# Altium PCB PROC091F_ASCII.PcbDoc (part 2 of 7)
Units mil, origin at the board's own origin, x right, y up, seen from the top; angles counter-clockwise.
Board outline 3590.95 x 906.17 mil, 8 copper layers (Top Layer, GND1, Sig1, PWR1, PWR2, Sig2, GND2, Bottom Layer), stack 63.146 mil thick; 420 components, 316 nets, 1432 pads, 774 vias.
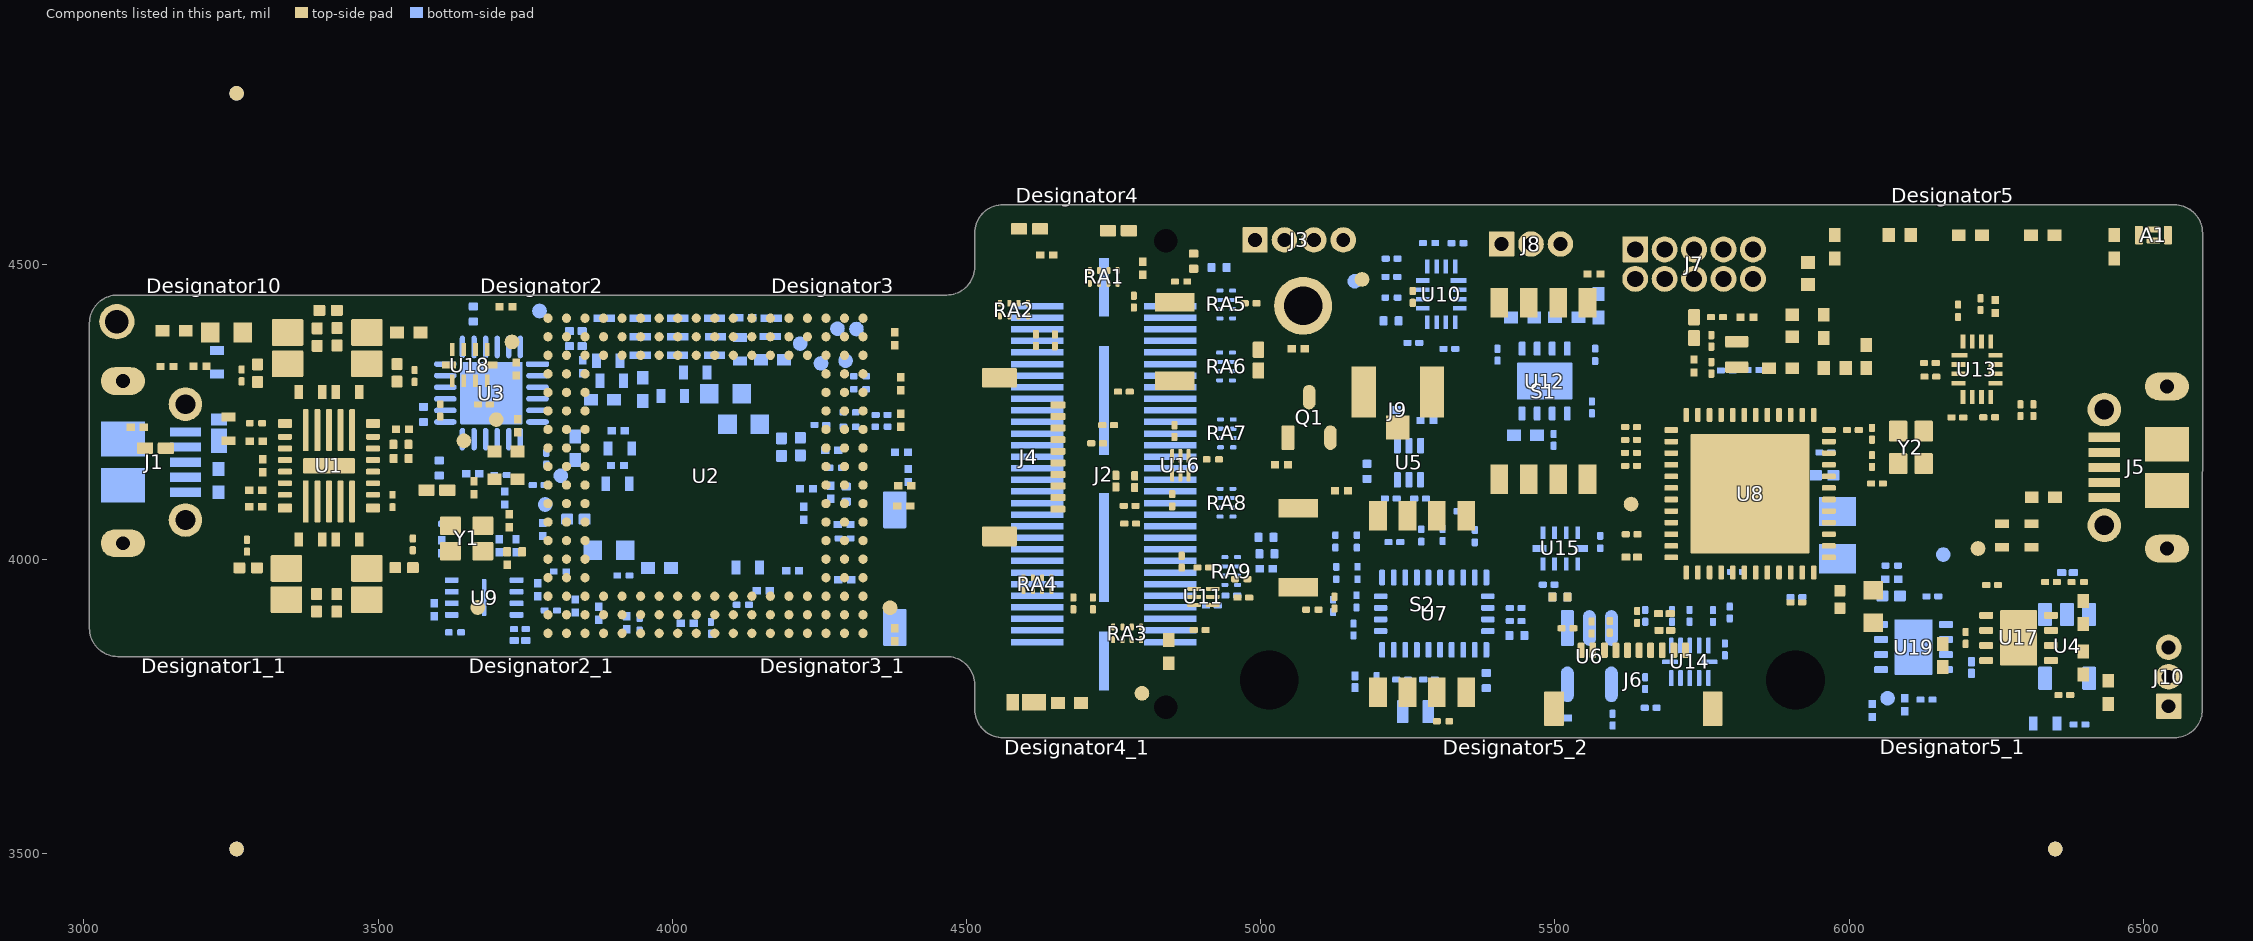
[diagram p8: the components of this part, seen from the top]

## Components (designator, comment, footprint, x,y, rotation, side; value= is the part's Value field where it differs from the comment) (continued)
LD3 "APHHS1005CGCK" APHHS1005_Green 4758.14,4558.15 r0 top
LD4 "APHHS1005CGCK" APHHS1005_Green 3600,4117.07 r0 top
LD5 "APHHS1005CGCK" APHHS1005_Green 4996.12,4338.02 r270 top
LD6 "APHHS1005CGCK" APHHS1005_Green 5736.37,4393.36 r90 top
Q1 "BSS123-7-F" FP-BSS123-7-F_SOT23-IPC_C 5082.37,4240.81 r90 top
R1 "RR0306P-103-D" FP-RR0306P-103-D_0201-IPC_C 5577.06,4028.97 r90 bottom
R2 "RC0201JR-070RL" "FP-RC0201JR-070RL_0201 (0603 Metric)-MFG" 4295.7,4110.3 r270 bottom
R3 "RR0306P-103-D" FP-RR0306P-103-D_0201-IPC_C 3793.63,3912.76 r180 bottom
R4 "CRCW0201100KFKED" 0201L 3717.54,4429.01 r180 top
R5 "CRCW0201100KFKED" 0201L 4378.13,4374.27 r270 top
R6 "CRCW020133R2FNED" 0201L 3706.27,4022.49 r270 bottom
R7 "RR0306P-103-D" FP-RR0306P-103-D_0201-IPC_C 3944.52,3889.21 r90 bottom
R8 "RR0306P-103-D" FP-RR0306P-103-D_0201-IPC_C 3916.9,3972.12 r180 bottom
R9 "CRCW0201100KFKED" 0201L 3835,3920.2 r270 bottom
R10 "AC0201FR-0720RL" FP-AC0201FR-0720RL_0201-IPC_C 4917.01,3921 r180 bottom
R11 "AC0201FR-0720RL" FP-AC0201FR-0720RL_0201-IPC_C 4950.01,3937.94 r180 bottom
R12 "RC0201JR-070RL" "FP-RC0201JR-070RL_0201 (0603 Metric)-MFG" 4929.17,4495.46 r0 bottom
R13 "RC0201JR-07220RL" 0201L 4636.42,4516.76 r180 top locked
R14 "RC0201JR-070RL" "FP-RC0201JR-070RL_0201 (0603 Metric)-MFG" 4886,4506.26 r90 top
R15 "RC0201JR-07220RL" 0201L 3663,4121.49 r90 top
R16 "RC0201FR-077K87L" 0201L 5566.39,4484.46 r180 top
R17 "RC0201JR-07220RL" 0201L 5736.37,4328.17 r90 top
R18 "RR0306P-103-D" FP-RR0306P-103-D_0201-IPC_C 5363.78,4038.98 r270 bottom
R19 "RR0306P-103-D" FP-RR0306P-103-D_0201-IPC_C 3605.65,4252.67 r270 top
R20 "RR0306P-103-D" FP-RR0306P-103-D_0201-IPC_C 6072.37,3988.94 r180 bottom
R21 "RR0306P-103-D" FP-RR0306P-103-D_0201-IPC_C 4318.97,4310.76 r0 bottom
R22 "RR0306P-103-D" FP-RR0306P-103-D_0201-IPC_C 4318.97,4288.76 r0 bottom
R23 "RR0306P-103-D" FP-RR0306P-103-D_0201-IPC_C 4301.24,4249.29 r0 bottom
R24 "CRCW0402200RFKEDHP" FP-CRCW0402200RFKEDHP_0402-IPC_C 6071.37,3937.46 r180 bottom
R25 "RC0201FR-074K99L" 0201L 3292.98,4200.49 r180 top
R26 "RC0201FR-074K99L" 0201L 3292.13,4116.99 r180 top
R27 "RC0201JR-07510RL" 0201L 6094.58,3752.54 r90 bottom
R28 "RC0201JR-070RL" "FP-RC0201JR-070RL_0201 (0603 Metric)-MFG" 3538.8,4195 r180 top
R29 "CRCW0201100KFKED" 0201L 6072.37,3965.94 r180 bottom
R30 "RC0201JR-070RL" "FP-RC0201JR-070RL_0201 (0603 Metric)-MFG" 5221.5,4404.87 r0 bottom locked
R31 "RC0201JR-070RL" "FP-RC0201JR-070RL_0201 (0603 Metric)-MFG" 5010.5,4008.93 r0 bottom
R32 "RC0201JR-070RL" "FP-RC0201JR-070RL_0201 (0603 Metric)-MFG" 3539.13,4171 r180 top
R33 "RC0201FR-074K99L" 0201L 3292.13,4088.65 r180 top
R34 "RC0201FR-074K99L" 0201L 3541.5,4220.5 r0 top
R35 "RR0306P-103-D" FP-RR0306P-103-D_0201-IPC_C 3292.52,4231 r180 top
R36 "RR0306P-103-D" FP-RR0306P-103-D_0201-IPC_C 3524.56,4098.79 r270 top
R37 "CRCW0201100KFKED" 0201L 5009.23,3983.33 r180 bottom
R38 "RC0201FR-074K99L" 0201L 5282.68,4235.46 r0 bottom
R39 "RC0201JR-07510RL" 0201L 3090.67,4224.06 r0 top
R40 "RC0201FR-074K99L" 0201L 3660.79,4145.37 r0 bottom
R41 "RC0201JR-070RL" "FP-RC0201JR-070RL_0201 (0603 Metric)-MFG" 3825.31,4374.62 r90 bottom
R42 "RC0201JR-07220RL" 0201L 4799.25,4494.23 r270 top locked
R43 "RR0306P-103-D" FP-RR0306P-103-D_0201-IPC_C 3630.7,3875.43 r0 bottom
R44 "RR0306P-103-D" FP-RR0306P-103-D_0201-IPC_C 3619.37,4059.85 r0 bottom
R45 "RR0306P-103-D" FP-RR0306P-103-D_0201-IPC_C 3809.22,3978.91 r0 bottom
R46 "CRCW020133R2FNED" 0201L 3595.37,3913.81 r90 bottom
R47 "CRCW020133R2FNED" 0201L 3734.37,4022.49 r270 bottom
R48 "CRCW020133R2FNED" 0201L 3608.37,4021.09 r270 bottom
R49 "CRCW020133R2FNED" 0201L 3771.3,3947.76 r270 bottom
R50 "RC0201JR-071KL" 0201L 3197.4,4327.73 r0 top
R51 "RC0201JR-070RL" "FP-RC0201JR-070RL_0201 (0603 Metric)-MFG" 5230.37,4240.37 r270 bottom locked
R52 "RC0201FR-071K96L" 0201L 3141.4,4327.36 r0 top
R53 "RC0402FR-073R83L" "FP-RC0402FR-073R83L_0402 (1005 Metric)-IPC_C" 3532.13,4316.35 r90 top
R54 "RC0402FR-073R83L" "FP-RC0402FR-073R83L_0402 (1005 Metric)-IPC_C" 3295.13,4316.07 r90 top
R55 "RC0402FR-073R83L" "FP-RC0402FR-073R83L_0402 (1005 Metric)-IPC_C" 3544.13,3985.35 r180 top
R56 "RC0402FR-073R83L" "FP-RC0402FR-073R83L_0402 (1005 Metric)-IPC_C" 3279.13,3985.21 r0 top
R57 "RC0201JR-070RL" "FP-RC0201JR-070RL_0201 (0603 Metric)-MFG" 5180.56,4149.19 r270 bottom locked
R58 "RC0201JR-070RL" "FP-RC0201JR-070RL_0201 (0603 Metric)-MFG" 5008.99,4036.94 r180 bottom
R59 "RR0306P-103-D" FP-RR0306P-103-D_0201-IPC_C 4301.24,4224.76 r0 bottom
R60 "RC0201JR-070RL" "FP-RC0201JR-070RL_0201 (0603 Metric)-MFG" 3846.82,4374.62 r90 bottom
R61 "RC0201JR-070RL" "FP-RC0201JR-070RL_0201 (0603 Metric)-MFG" 3577.24,4245.78 r270 bottom
R62 "RC0201JR-070RL" "FP-RC0201JR-070RL_0201 (0603 Metric)-MFG" 3662,4416.56 r90 bottom
R63 "RC0201JR-070RL" "FP-RC0201JR-070RL_0201 (0603 Metric)-MFG" 3604,4154.79 r270 bottom
R64 "RC0201FR-074K99L" 0201L 3715.38,4103.78 r90 bottom
R65 "RR0306P-103-D" FP-RR0306P-103-D_0201-IPC_C 3708.05,4143.04 r0 bottom
R66 "RC0201JR-070RL" "FP-RC0201JR-070RL_0201 (0603 Metric)-IPC_C" 4982.89,4434.77 r0 top
R67 "RC0201JR-070RL" "FP-RC0201JR-070RL_0201 (0603 Metric)-MFG" 5508.37,3935.46 r0 bottom
R68 "RC0201JR-070RL" "FP-RC0201JR-070RL_0201 (0603 Metric)-MFG" 5508.37,3935.46 r0 top
R69 "RC0201FR-074K99L" 0201L 5511.07,3729.96 r0 bottom
R70 "RC0201JR-070RL" "FP-RC0201JR-070RL_0201 (0603 Metric)-MFG" 5435.37,3870.14 r0 bottom
R71 "RC0201JR-070RL" "FP-RC0201JR-070RL_0201 (0603 Metric)-MFG" 5383.33,3793.46 r270 bottom
R72 "RC0201JR-070RL" "FP-RC0201JR-070RL_0201 (0603 METRIC)-IPC_C" 5433.38,3894.46 r180 bottom
R73 "RC0201JR-070RL" "FP-RC0201JR-070RL_0201 (0603 METRIC)-IPC_C" 5433.37,3917.06 r180 bottom
R74 "RC0201JR-070RL" "FP-RC0201JR-070RL_0201 (0603 METRIC)-IPC_C" 4896.36,3879.46 r0 top locked
R75 "RC0201JR-071KL" 0201L 3875.37,3907.8 r270 bottom
R76 "RC0201JR-070RL" "FP-RC0201JR-070RL_0201 (0603 METRIC)-IPC_C" 5698.97,3903.45 r90 bottom
R77 "RR0306P-103-D" FP-RR0306P-103-D_0201-IPC_C 5163.43,4030.06 r270 bottom locked
R78 "RR0306P-103-D" FP-RR0306P-103-D_0201-IPC_C 5164.52,3976.35 r270 bottom locked
R79 "ERJ-1GNF4701C" FP-ERJ-1GNF4701C_0201-IPC_C 5788.67,3846.46 r90 bottom
R80 "RR0306P-103-D" FP-RR0306P-103-D_0201-IPC_C 5123,3920.48 r90 bottom
R81 "RR0306P-103-D" FP-RR0306P-103-D_0201-IPC_C 5344.92,4081.19 r180 bottom locked
R82 "RR0306P-103-D" FP-RR0306P-103-D_0201-IPC_C 5272.85,4040.2 r270 bottom
R83 "RR0306P-103-D" FP-RR0306P-103-D_0201-IPC_C 4277.8,4155.3 r180 bottom
R84 "RR0306P-103-D" FP-RR0306P-103-D_0201-IPC_C 4119.89,3922.4 r0 bottom
R85 "RR0306P-103-D" FP-RR0306P-103-D_0201-IPC_C 4355.44,4224.99 r0 bottom
R86 "RC0201JR-070RL" "FP-RC0201JR-070RL_0201 (0603 METRIC)-IPC_C" 5629.22,4180.57 r0 top
R87 "RC0201JR-070RL" "FP-RC0201JR-070RL_0201 (0603 METRIC)-IPC_C" 5629.37,4202.46 r0 top
R88 "AC0201FR-0720RL" FP-AC0201FR-0720RL_0201-IPC_C 4778.18,4060.33 r180 top locked
R89 "CRCW0201100KFKED" 0201L 5826.38,4411.08 r0 top
R90 "RC0201JR-070RL" "FP-RC0201JR-070RL_0201 (0603 METRIC)-IPC_C" 5837.39,4321.29 r180 bottom
R91 "RC0201JR-070RL" "FP-RC0201JR-070RL_0201 (0603 METRIC)-IPC_C" 5910.14,3926.46 r180 top
R92 "CRCW0201100KFKED" 0201L 6039.37,3742.65 r270 bottom
R93 "RR0306P-103-D" FP-RR0306P-103-D_0201-IPC_C 5126.93,4030.08 r90 bottom locked
R94 "RR0306P-103-D" FP-RR0306P-103-D_0201-IPC_C 5286.18,4537.08 r0 bottom locked
R95 "RR0306P-103-D" FP-RR0306P-103-D_0201-IPC_C 5222.16,4444.39 r180 bottom locked
R96 "RR0306P-103-D" FP-RR0306P-103-D_0201-IPC_C 5162.8,3928.09 r90 bottom locked
R97 "RC0201JR-070RL" "FP-RC0201JR-070RL_0201 (0603 METRIC)-IPC_C" 5309.27,4040.92 r90 bottom
R98 "RR0306P-103-D" FP-RR0306P-103-D_0201-IPC_C 5128.47,3976.25 r90 bottom locked
R99 "RC0201JR-070RL" "FP-RC0201JR-070RL_0201 (0603 METRIC)-IPC_C" 5222.1,4479.52 r180 bottom locked
R100 "RC0201JR-070RL" "FP-RC0201JR-070RL_0201 (0603 METRIC)-IPC_C" 5320.66,4357.38 r0 bottom
R101 "RC0201JR-070RL" "FP-RC0201JR-070RL_0201 (0603 METRIC)-IPC_C" 5222.36,4510.46 r180 bottom
R102 "RC0201JR-070RL" "FP-RC0201JR-070RL_0201 (0603 METRIC)-IPC_C" 5792.03,4320.41 r0 bottom
R103 "RC0201JR-070RL" "FP-RC0201JR-070RL_0201 (0603 METRIC)-IPC_C" 4355.64,4245.1 r0 bottom
R104 "RR0306P-103-D" FP-RR0306P-103-D_0201-IPC_C 4966.89,3965.95 r0 top locked
R105 "RC0201JR-070RL" "FP-RC0201JR-070RL_0201 (0603 METRIC)-IPC_C" 4865.78,3995.57 r90 top
R106 "RC0201JR-070RL" "FP-RC0201JR-070RL_0201 (0603 METRIC)-IPC_C" 4902.35,3985.56 r0 top locked
R107 "RC0201JR-07510RL" 0201L 5063.61,4357.18 r180 top
R108 "RC0201JR-07510RL" 0201L 5035.32,4159.98 r0 top
R109 "RC0201JR-070RL" "FP-RC0201JR-070RL_0201 (0603 Metric)-MFG" 3732.14,4012.38 r0 top
R110 "RR0306P-103-D" FP-RR0306P-103-D_0201-IPC_C 5309.89,3724.46 r0 top
R111 "RC0201JR-07220RL" 0201L 5137.39,4116.46 r0 top
R112 "RC0201JR-070RL" "FP-RC0201JR-070RL_0201 (0603 METRIC)-IPC_C" 5259.36,4367.46 r0 bottom
R113 "RC0201JR-070RL" "FP-RC0201JR-070RL_0201 (0603 METRIC)-IPC_C" 5258.37,4445.48 r270 top
R114 "CRCW040261R9FKED" 0402L 6397.76,3909.29 r270 top
R115 "RC0201JR-070RL" "FP-RC0201JR-070RL_0201 (0603 Metric)-IPC_C" 6342.98,3961 r0 top
R116 "RC0201JR-070RL" "FP-RC0201JR-070RL_0201 (0603 Metric)-IPC_C" 6242.98,3956 r0 top
R117 "CRCW040261R9FKED" 0402L 6397.85,3823.52 r270 top
R118 "RR0306P-103-D" FP-RR0306P-103-D_0201-IPC_C 6185,4422 r90 top
R119 "CRCW040261R9FKED" 0402L 5520.06,4410.82 r180 bottom
R120 "RC0201JR-070RL" "FP-RC0201JR-070RL_0201 (0603 Metric)-IPC_C" 6291,4252.99 r90 top
R121 "RC0201JR-070RL" "FP-RC0201JR-070RL_0201 (0603 METRIC)-IPC_C" 6137.23,4333.23 r180 top
R122 "RR0306P-103-D" FP-RR0306P-103-D_0201-IPC_C 5568.37,4347.11 r270 bottom
R123 "RC0201JR-070RL" "FP-RC0201JR-070RL_0201 (0603 METRIC)-IPC_C" 5562.87,4257.76 r90 bottom
R124 "RR0306P-103-D" FP-RR0306P-103-D_0201-IPC_C 4864.68,4471.7 r0 top
R125 "RR0306P-103-D" FP-RR0306P-103-D_0201-IPC_C 5087.65,3914.04 r0 top
R126 "CRCW040261R9FKED" 0402L 5445.1,4410.54 r180 bottom
R127 "RC0201JR-070RL" "FP-RC0201JR-070RL_0201 (0603 METRIC)-IPC_C" 6137.99,4310 r0 top
R128 "RC0201JR-070RL" "FP-RC0201JR-070RL_0201 (0603 METRIC)-IPC_C" 6183.91,4240.71 r180 top
R129 "RC0201JR-070RL" "FP-RC0201JR-070RL_0201 (0603 METRIC)-IPC_C" 5125.2,3925.93 r90 top
R130 "AC0201FR-0720RL" FP-AC0201FR-0720RL_0201-IPC_C 4617.95,4372.15 r270 top locked
R131 "RC0201JR-070RL" "FP-RC0201JR-070RL_0201 (0603 METRIC)-IPC_C" 5809.36,3978.41 r180 bottom
R132 "AC0201FR-0720RL" FP-AC0201FR-0720RL_0201-IPC_C 4777.33,4090.57 r180 top locked
R133 "AC0201FR-0720RL" FP-AC0201FR-0720RL_0201-IPC_C 4740.67,4227.63 r180 top locked
R134 "RR0306P-103-D" FP-RR0306P-103-D_0201-IPC_C 6388.49,3961 r0 top
R135 "AC0201FR-0720RL" FP-AC0201FR-0720RL_0201-IPC_C 4722.06,4196.8 r180 top locked
R136 "RC0201JR-070RL" "FP-RC0201JR-070RL_0201 (0603 Metric)-IPC_C" 6238.01,4241 r0 top
R137 "AC0201FR-0720RL" FP-AC0201FR-0720RL_0201-IPC_C 4681.54,3924.7 r90 top locked
R138 "AC0201FR-0720RL" FP-AC0201FR-0720RL_0201-IPC_C 4767.38,4284.46 r180 top
R139 "RC0201JR-070RL" "FP-RC0201JR-070RL_0201 (0603 Metric)-IPC_C" 6313,4252.99 r270 top
R140 "AC0201FR-0720RL" FP-AC0201FR-0720RL_0201-IPC_C 4714.81,3924.69 r90 top locked
R141 "RC0201FR-074K99L" 0201L 6248.22,4429.26 r90 top
R158 "RC0201FR-0782K5L" 0201L 4228.2,4119.6 r0 bottom
R159 "RC0201JR-07750RL" 0201L 4223.5,4078.1 r270 bottom
R160 "RC0201JR-070RL" "FP-RC0201JR-070RL_0201 (0603 METRIC)-IPC_C" 5768.53,3903.27 r90 bottom
R161 "RC0201JR-070RL" "FP-RC0201JR-070RL_0201 (0603 METRIC)-IPC_C" 5629.37,4158.46 r0 top
R166 "RC0201JR-070RL" "FP-RC0201JR-070RL_0201 (0603 METRIC)-IPC_C" 5728.8,3903.59 r90 bottom
R168 "RC0201JR-070RL" "FP-RC0201JR-070RL_0201 (0603 METRIC)-IPC_C" 5653.43,3903.57 r90 bottom
R170 "RC0201FR-0782K5L" 0201L 4154.35,3946.46 r180 bottom
R171 "RC0201JR-07750RL" 0201L 4204.44,3980.18 r0 bottom
R172 "RC0201FR-0782K5L" 0201L 4401.11,4142.03 r90 bottom
R174 "RC0201FR-077K87L" 0201L 4269.1,4113.8 r90 bottom
R176 "RC0201FR-077K87L" 0201L 4389.6,4181.8 r0 bottom
R177 "RR0306P-103-D" FP-RR0306P-103-D_0201-IPC_C 4849.59,4099.95 r90 top
R178 "RR0306P-103-D" FP-RR0306P-103-D_0201-IPC_C 4918.69,4169.46 r180 top
R180 "ERJ-1GNF4701C" FP-ERJ-1GNF4701C_0201-IPC_C 5653.37,3789.15 r270 bottom
R181 "ERJ-1GNF4701C" FP-ERJ-1GNF4701C_0201-IPC_C 5639.79,3901.65 r90 top
R182 "RC0201JR-070RL" "FP-RC0201JR-070RL_0201 (0603 METRIC)-IPC_C" 4650.14,4371.83 r270 top locked
R183 "RC0201JR-070RL" "FP-RC0201JR-070RL_0201 (0603 METRIC)-IPC_C" 5593.19,3884.84 r90 top
R184 "RC0201JR-070RL" "FP-RC0201JR-070RL_0201 (0603 METRIC)-IPC_C" 5562.38,3883.78 r90 top
R185 "RC0201JR-070RL" "FP-RC0201JR-070RL_0201 (0603 METRIC)-IPC_C" 5521.36,3882.46 r180 top
RA1 "EXB-18VR000X" FP-EXB-18VR000X_0502-MFG 4733.17,4479.49 r180 top locked
RA2 "EXB-18VR000X" FP-EXB-18VR000X_0502-MFG 4580.6,4423.99 r180 top locked
RA3 "EXB-18VR000X" FP-EXB-18VR000X_0502-MFG 4772.94,3873.84 r0 top locked
RA4 "EXB-18VR000X" FP-EXB-18VR000X_0502-MFG 4620.57,3957.49 r0 top locked
RA5 "EXB-18VR000X" FP-EXB-18VR000X_0502-MFG 4941.51,4432.71 r90 bottom locked
RA6 "EXB-18VR000X" FP-EXB-18VR000X_0502-MFG 4941.09,4327.39 r90 bottom locked
RA7 "EXB-18VR000X" FP-EXB-18VR000X_0502-MFG 4942.52,4213.65 r90 bottom locked
RA8 "EXB-18VR000X" FP-EXB-18VR000X_0502-MFG 4941.86,4095.87 r90 bottom locked
RA9 "EXB-18VR000X" FP-EXB-18VR000X_0502-MFG 4949.85,3979.76 r90 bottom locked
S1 "218-4LPST" SW_218-4LPST 5480.37,4285.46 r90 top
S2 "218-4LPST" SW_218-4LPST 5274.37,3923.46 r90 top
S3 "CHS-01TA" FP-CHS-01TA_SMT_SW_5MM4_2MM5-MFG 4378.13,3983.7 r270 bottom
SW2 "B3U-1000P" SW_B3U-1000P 4854.16,4369.94 r270 top
SW3 "B3U-1000P" SW_B3U-1000P 5063.87,4019.39 r90 top
TP2 "TESTPOINT" TP_25MIL-SMT 3810.59,4141.77 r90 bottom
TP3 "TESTPOINT" TP_25MIL-SMT 3784,4092.76 r90 bottom
TP4 "TESTPOINT" TP_25MIL-SMT 6159.89,4007.65 r180 bottom
TP5 "TESTPOINT" TP_25MIL-SMT 3669.3,3917.72 r90 top
TP6 "TESTPOINT" TP_25MIL-SMT 4313,4390.94 r0 bottom
TP7 "TESTPOINT" TP_25MIL-SMT 4280.69,4391.59 r270 bottom
TP8 "TESTPOINT" TP_25MIL-SMT 4252.7,4332.6 r90 bottom
TP9 "TESTPOINT" TP_25MIL-SMT 4217.3,4366.19 r90 bottom
TP10 "TESTPOINT" TP_25MIL-SMT 6065.37,3763.46 r270 bottom
TP11 "TESTPOINT" TP_25MIL-SMT 4370,3917.37 r90 top
TP12 "TESTPOINT" TP_VIA_060RND040 3056.09,4403.54 r90 top
TP13 "TESTPOINT" TP_25MIL-SMT 4798.18,3771.83 r270 top
TP14 "TESTPOINT" TP_25MIL-SMT 4294.6,4337.1 r180 bottom
TP15 "TESTPOINT" TP_25MIL-SMT 6219,4018 r90 top
TP16 "TESTPOINT" TP_25MIL-SMT 5629.37,4093.46 r180 top
TP17 "TESTPOINT" TP_25MIL-SMT 3701,4237 r270 top
TP18 "TESTPOINT" TP_25MIL-SMT 3727.56,4369.01 r90 top
TP19 "TESTPOINT" TP_25MIL-SMT 3645.95,4200.94 r90 top
TP20 "4953" FP-4953_HDR1-MFG 5072.16,4430.47 r180 bottom locked
TP26 "TESTPOINT" TP_25MIL-SMT 3774.42,4421.63 r0 bottom
TP27 "TESTPOINT" TP_25MIL-SMT 5172.19,4475.26 r270 top
TP46 "TESTPOINT" TP_25MIL-SMT 5159.8,4472.11 r180 bottom locked
U1 "LP87524JRNFRQ1" RNF0026C 3416.61,4158.52 r180 top
U2 "XI6843ARQGALP" ALP0180A 4056.48,4141.61 r90 top
U3 "CP2105-F01-GMR" FP-CP2105-F01-GMR_QFN24-EP-IPC_A 3692.64,4282.2 r180 bottom
U4 "TPS79330DBVR" DBV0005A_N 6370.37,3851.63 r270 bottom
U5 "TMP112AQDRLRQ1" DRL0006A 5251.98,4163.77 r270 bottom locked
U6 "CAT24C08TDI-GT3" FP-CAT24C08TDI-GT3_TSOT-23-5-IPC_A 5558.54,3835.01 r270 bottom
U7 "BNO085" FP-BNO085_LGA28-MFG 5294.88,3907.22 r270 bottom
U8 "CC2642R1FRGZR" RGZ0048A 5831.57,4111.11 r270 top
U9 "MX25R1635FZUIH0" USON-8L 3680.29,3934.68 r0 bottom
U10 "TCA6408ARSVR" RSV0016A 5306.8,4449.73 r180 bottom locked
U11 "SN74LVC1G3157DSFR" DSF0006A 4902.7,3935.72 r0 top locked
U12 "TCAN1042HGVDRBRQ1" DRB0008F#1 5482.58,4302.51 r90 bottom
U13 "TS3A5018RSVR" RSV0016A 6217.13,4322.76 r0 top
U14 "TXB0104QRUTRQ1" RUT0012A 5729.23,3825.36 r90 bottom
U15 "TS5A23157RSER" RSE0010A 5509.21,4018.34 r270 bottom
U16 "SN74LVC1G11DSFR" DSF0006A-MFG 4863.37,4159.46 r90 top
U17 "TCAN1042HGVDRBRQ1" DRB0008F#2 6287.97,3866 r0 top
U18 "TS5A23157RSER" RSE0010A 3655.79,4329.59 r270 top
U19 "TPS2115ADRBR" DRB0008B 6109.37,3850.46 r0 bottom
Y1 "CX2016DB40000D0FLJCC" FP-CX2016DB40000D0FLJCC_SMT_2MM0_1MM6-MFG 3650.54,4035.03 r0 top
Y2 "CX2016DB48000C0WPLA2" FP-CX2016DB48000C0WPLA2_SMD4-MFG 6104.9,4189.85 r270 top
Y3 "ABS05W-32.768KHZ-D-2-T" FP-ABS05W-32.768KHZ-D-2-T_XTAL_SMT_1MM6_1MM0-MFG 5808.9,4347.93 r270 top
Y4 "ABS05W-32.768KHZ-D-2-T" FP-ABS05W-32.768KHZ-D-2-T_XTAL_SMT_1MM6_1MM0-MFG 5262.82,3740.88 r0 bottom locked
ZZ1 "This Assembly Note is for PCB labels only" AssemblyNoteLabel 2349.62,2814.36 r0 top
ZZ2 "These assemblies are ESD sensitive, ESD precautions shall be observed." AssemblyNote 2346.49,2738.89 r0 top
ZZ3 "These assemblies must be clean and free from flux and all contaminants. Use of no clean flux is not acceptable." AssemblyNote 2346.43,2653.5 r0 top
ZZ4 "These assemblies must comply with workmanship standards IPC-A-610 Class 2, unless otherwise specified." AssemblyNote 2343.34,2567.2 r0 top
ZZ5.1 "Cut the thermal pad(Part Number#GPVOUS-0.125-AC-0816) for the shape and size of the inner surface of the heatsink(Part Number#MCH054) and paste it on the inner surface of the heatsink;" AssemblyNote 2340.76,2492.7 r0 top
ZZ5.2 "Bring the heatsink onto the PCB bottom side (Opposite side of AOP device). Match the teeth in the heatsink with break-away area in the PCB and press the heatsink onto the PCB slightly so as thermal pad is spread all over the area" AssemblyNote 2343.41,2409 r0 top

## Footprints (in the part's own frame and the unit in brackets; to place one, negate y for a bottom-side part, rotate by r counter-clockwise, add the part's x,y. Pads: shape width x height; smd on the part's side, far side on the other; paste and mask are expansions set on the pad)
0201_033L [mm] "0201"
  rect 0.36x0.32 smd mask+0: 1(-0.28,0) 2(0.28,0)
0201L [mm] "Data from Kemet datasheet CC101_COM dated 7/28/11"
  rect 0.36x0.32 smd mask+0: 1(-0.28,0) 2(0.28,0)
0402_070 [mil] "SMD, 2-Leads, Body 1.2x0.7mm, Height 0.7mm"
  rect 15x24 smd: 1(-20,0) 2(20,0)
0402L [mm] "0402 from SM-752 data"
  rect 0.6x0.5 smd: 1(-0.5,0) 2(0.5,0)
0603L [mm] "0603 from SM-752 data"
  rect 0.8x0.85 smd: 1(-0.7,0) 2(0.7,0)
  silkscreen extent -0.07,-0.33 0.07,0.33
0805_HV [mil] "0805 with 30mil clearance between pads"
  rect 50x63 smd: 1(-40,0) 2(40,0)
  silkscreen extent -74,-40 74,40
ALP0180A [mm] "BGA-180"
  round 0.4 smd: A1(-6.8,6.8) A2(-6,6.8) A3(-5.2,6.8) A4(-4.4,6.8) A5(-3.6,6.8) A6(-2.8,6.8) A7(-2,6.8) A8(-1.2,6.8) A9(-0.4,6.8) A10(0.4,6.8) A11(1.2,6.8) A12(2,6.8) A13(2.8,6.8) A14(3.6,6.8) A15(4.4,6.8) A16(5.2,6.8) A17(6,6.8) A18(6.8,6.8) B1(-6.8,6) B2(-6,6) B3(-5.2,6) B4(-4.4,6) B5(-3.6,6) B6(-2.8,6) B7(-2,6) B8(-1.2,6) B9(-0.4,6) B10(0.4,6) B11(1.2,6) B12(2,6) B13(2.8,6) B14(3.6,6) B15(4.4,6) B16(5.2,6) B17(6,6) B18(6.8,6) C1(-6.8,5.2) C2(-6,5.2) C3(-5.2,5.2) C4(-4.4,5.2) C5(-3.6,5.2) C6(-2.8,5.2) C7(-2,5.2) C8(-1.2,5.2) C9(-0.4,5.2) C10(0.4,5.2) C11(1.2,5.2) C12(2,5.2) C13(2.8,5.2) C14(3.6,5.2) C15(4.4,5.2) C16(5.2,5.2) C17(6,5.2) C18(6.8,5.2) D1(-6.8,4.4) D2(-6,4.4) D3(-5.2,4.4) D16(5.2,4.4) D17(6,4.4) D18(6.8,4.4) E1(-6.8,3.6) E2(-6,3.6) E3(-5.2,3.6) E16(5.2,3.6) E17(6,3.6) E18(6.8,3.6) F1(-6.8,2.8) F2(-6,2.8) F3(-5.2,2.8) F16(5.2,2.8) F17(6,2.8) F18(6.8,2.8) G1(-6.8,2) G2(-6,2) G3(-5.2,2) G16(5.2,2) G17(6,2) G18(6.8,2) H1(-6.8,1.2) H2(-6,1.2) H3(-5.2,1.2) H16(5.2,1.2) H17(6,1.2) H18(6.8,1.2) J1(-6.8,0.4) J2(-6,0.4) J3(-5.2,0.4) J16(5.2,0.4) J17(6,0.4) J18(6.8,0.4) K1(-6.8,-0.4) K2(-6,-0.4) K3(-5.2,-0.4) K16(5.2,-0.4) K17(6,-0.4) K18(6.8,-0.4) L1(-6.8,-1.2) L2(-6,-1.2) L3(-5.2,-1.2) L16(5.2,-1.2) L17(6,-1.2) L18(6.8,-1.2) M1(-6.8,-2) M2(-6,-2) M3(-5.2,-2) M16(5.2,-2) M17(6,-2) M18(6.8,-2) N1(-6.8,-2.8) N2(-6,-2.8) N3(-5.2,-2.8) N16(5.2,-2.8) N17(6,-2.8) N18(6.8,-2.8) P1(-6.8,-3.6) P2(-6,-3.6) P3(-5.2,-3.6) P16(5.2,-3.6) P17(6,-3.6) P18(6.8,-3.6) R1(-6.8,-4.4) R2(-6,-4.4) R3(-5.2,-4.4) R16(5.2,-4.4) R17(6,-4.4) R18(6.8,-4.4) T1(-6.8,-5.2) T2(-6,-5.2) T3(-5.2,-5.2) T4(-4.4,-5.2) T5(-3.6,-5.2) T6(-2.8,-5.2) T7(-2,-5.2) T8(-1.2,-5.2) T9(-0.4,-5.2) T10(0.4,-5.2) T11(1.2,-5.2) T12(2,-5.2) T13(2.8,-5.2) T14(3.6,-5.2) T15(4.4,-5.2) T16(5.2,-5.2) T17(6,-5.2) T18(6.8,-5.2) U1(-6.8,-6) U2(-6,-6) U3(-5.2,-6) U4(-4.4,-6) U5(-3.6,-6) U6(-2.8,-6) U7(-2,-6) U8(-1.2,-6) U9(-0.4,-6) U10(0.4,-6) U11(1.2,-6) U12(2,-6) U13(2.8,-6) U14(3.6,-6) U15(4.4,-6) U16(5.2,-6) U17(6,-6) U18(6.8,-6) V1(-6.8,-6.8) V2(-6,-6.8) V3(-5.2,-6.8) V4(-4.4,-6.8) V5(-3.6,-6.8) V6(-2.8,-6.8) V7(-2,-6.8) V8(-1.2,-6.8) V9(-0.4,-6.8) V10(0.4,-6.8) V11(1.2,-6.8) V12(2,-6.8) V13(2.8,-6.8) V14(3.6,-6.8) V15(4.4,-6.8) V16(5.2,-6.8) V17(6,-6.8) V18(6.8,-6.8)
  silkscreen extent -7.5,-7.5 7.5,7.5
APHHS1005_Green [mm] "SMD, 2-Leads, Body 1x0.5mm"
  rrect20% 0.7x0.5 smd: 1(-0.45,0) 2(0.45,0)
  silkscreen extent -0.8,-0.65 1.2,0.65
AssemblyNote [mil] "Assembly Note"
AssemblyNoteLabel [mil] "Assembly Note for PCB Labels"
BRAKE_WAY_HOLES1X2 [mil]
  round 27 hole 32 unplated mask+0: ""(-50,30.26) ""(0,30.26) ""(50,30.26)
CONN_105017-0001 [mm] "Molex Micro USB-B"
  rect 0.4x1.35 smd: 1(-1.3,1.35) 2(-0.65,1.35) 3(0,1.35) 4(0.65,1.35) 5(1.3,1.35)
  oval 1.2x1.9 hole 0.6 slot 1.3 at 90 deg: 6(-3.5,-1.35) 9(3.5,-1.35)
  rect 1.5x1.9 smd: 7(-1,-1.35) 8(1,-1.35)
  round 1.45 hole 0.85: 10(2.5,1.35) 11(-2.5,1.35)
  Top Layer region: -3.5,-0.4 -2.3,-0.4 -2.3,-2.3 -3.5,-2.3
  Top Layer region: 3.5,-2.3 2.3,-2.3 2.3,-0.4 3.5,-0.4
  silkscreen extent -4.1,-0.2 4.1,1.4
CONN_UFL-R-SMT-1 [mm] "Hirose recommended land pattern http://www.hirose.co.jp/cataloge_hp/e32119372.pdf 2009.2"
  rect 1.05x1 smd paste-0.1 mask+0: 1(-1.525,0)
  rect 2x0.9 on Top Paste: 2(0,1.5) 3(0,-1.5)
  rect 2x0.9 on Top Solder: 2(0,1.5) 3(0,-1.5)
  rect 2.2x1.05 smd paste-2 mask+0: 2(0,1.475) 3(0,-1.475)
  Top Layer keep-out region: -0.8,-0.702 1.1,-0.702 1.1,0.698 -0.8,0.698
  silkscreen extent -1.7,-1.7 1.7,1.7
DBV0005A_N [mm] "SOT23, 5-Leads, Body 2.9x1.6mm, Pitch 0.95mm, Lead Span 2.8mm, IPC Medium Density"
  rrect17% 1x0.6 smd: 1(-1.375,0.95) 2(-1.375,0) 3(-1.375,-0.95) 4(1.375,-0.95) 5(1.375,0.95)
  silkscreen extent -0.25,-1.55 0.25,1.55
DRB0008B [mm] "SON, 8-Leads, Body 3x3mm, Pitch 0.65mm, Thermal Pad 2.4x1.65mm, TI Recommended"
  rrect33% 0.6x0.3 smd: 1(-1.4,0.975) 2(-1.4,0.325) 3(-1.4,-0.325) 4(-1.4,-0.975) 5(1.4,-0.975) 6(1.4,-0.325) 7(1.4,0.325) 8(1.4,0.975)
  rrect9% 1.47x1.06 on Bottom Paste: 9(0,-0.63) 9(0,0.63)
  rrect6% 1.65x2.4 smd paste-1.2: 9(0,0)
  silkscreen extent -1.73,-1.73 1.73,1.73
DRB0008F#1 [mm] "SON, 8-Leads, Body 3x3mm, Pitch 0.65mm, Thermal Pad 2.4x1.6mm, TI Recommended"
  rrect33% 0.6x0.3 smd: 1(-1.4,0.975) 2(-1.4,0.325) 3(-1.4,-0.325) 4(-1.4,-0.975) 5(1.4,-0.975) 6(1.4,-0.325) 7(1.4,0.325) 8(1.4,0.975)
  rrect9% 1.47x1.07 on Bottom Paste: 9(0,-0.635) 9(0,0.635)
  rrect6% 1.6x2.4 smd paste-1.2: 9(0,0)
  silkscreen extent -1.73,-1.73 1.73,1.73
DRB0008F#2 [mm] "SON, 8-Leads, Body 3x3mm, Pitch 0.65mm, Thermal Pad 2.4x1.6mm, TI Recommended"
  rrect33% 0.6x0.3 smd: 1(-1.4,0.975) 2(-1.4,0.325) 3(-1.4,-0.325) 4(-1.4,-0.975) 5(1.4,-0.975) 6(1.4,-0.325) 7(1.4,0.325) 8(1.4,0.975)
  rrect9% 1.47x1.07 on Top Paste: 9(0,-0.635) 9(0,0.635)
  rrect6% 1.6x2.4 smd paste-1.2: 9(0,0)
  silkscreen extent -1.73,-1.73 1.73,1.73
DRL0006A [mm] "SOTFL, 6-Flat Leads, Body 1.2x1.6x0.6mm, Pitch 0.5mm, TI recommended"
  rrect33% 0.67x0.3 smd: 1(-0.74,0.5) 2(-0.74,0) 3(-0.74,-0.5) 4(0.74,-0.5) 5(0.74,0) 6(0.74,0.5)
  silkscreen extent -0.9,-0.95 0.5,0.95
DSF0006A [mm] "TI recommended land pattern"
  rrect59% 0.6x0.17 smd mask+0: 1(-0.4,0.35) 2(-0.4,0) 3(-0.4,-0.35) 4(0.4,-0.35) 5(0.4,0) 6(0.4,0.35)
  silkscreen extent -0.6,-0.63 0.6,0.63
DSF0006A-MFG [mm]
  rrect59% 0.6x0.17 smd paste+0 mask+0: 1(-0.4,0.35) 2(-0.4,0) 3(-0.4,-0.35) 4(0.4,-0.35) 5(0.4,0) 6(0.4,0.35)
  silkscreen extent -1.14,-0.85 0.53,1.02
DSN2_0603 [mm] "SMD, 2-Leads, Body 1.6x0.8mm"
  rect 0.52x0.7 smd: 1(-0.64,0)
  rect 1.05x0.7 smd: 2(0.275,0)
  silkscreen extent -1.4,-0.75 0.8,0.65
FIDUCIAL6.4-20 [mil]
  round 25 smd mask+0: 1(0,0)
FP-250R05L120JV4T_0201-IPC_C [mm]
  rrect38% 0.363x0.263 smd paste+0 mask+0: 1(-0.25,0) 2(0.25,0)
FP-4953_HDR1-MFG [mm]
  round 2.5 hole 1.65 paste-1000 mask+0: 1(0,0)
FP-51441-1093_CONN_SMD_FFC-0 [mm]
  rrect33% 0.3x0.65 smd paste+0 mask+0: 1(-2.25,1.775) 2(-1.75,1.775) 3(-1.25,1.775) 4(-0.75,1.775) 5(-0.25,1.775) 6(0.25,1.775) 7(0.75,1.775) 8(1.25,1.775) 9(1.75,1.775) 10(2.25,1.775)
  rrect12% 0.85x1.5 smd paste+0 mask+0: 11(-3.425,-0.75) 12(3.425,-0.75)
FP-ABS05W-32.768KHZ-D-2-T_XTAL_SMT_1MM6_1MM0-MFG [mm]
  rrect20% 0.5x1 smd paste+0 mask+0: 1(-0.55,0) 2(0.55,0)
FP-AC0201FR-0720RL_0201-IPC_C [mil]
  rrect38% 13.94x10.34 smd paste+0 mask+0: 1(-10.01,0) 2(10.01,0)
FP-ANT016008LCS2442MA2_SMT_ANT-0 [mm]
  rrect29% 0.35x0.8 smd paste+0 mask+0: 1(-0.625,0) 4(0.625,0)
  rrect38% 0.6x0.26 smd paste+0 mask+0: 2-3(0,-0.235) 5-6(0,0.235)
FP-BNO085_LGA28-MFG [mm]
  rrect40% 0.675x0.25 smd paste+0 mask+0: 1(1.562,2.25) 6(-1.562,2.25) 7(-1.562,1.75) 8(-1.562,1.25) 9(-1.562,0.75) 10(-1.562,0.25) 11(-1.562,-0.25) 12(-1.562,-0.75) 13(-1.562,-1.25) 14(-1.562,-1.75) 15(-1.562,-2.25) 20(1.562,-2.25) 21(1.562,-1.75) 22(1.562,-1.25) 23(1.562,-0.75) 24(1.562,-0.25) 25(1.562,0.25) 26(1.562,0.75) 27(1.562,1.25) 28(1.562,1.75)
  rrect40% 0.25x0.575 smd paste+0 mask+0: 2(0.75,2.312) 3(0.25,2.312) 4(-0.25,2.312) 5(-0.75,2.312) 16(-0.75,-2.312) 17(-0.25,-2.312) 18(0.25,-2.312) 19(0.75,-2.312)
FP-BSS123-7-F_SOT23-IPC_C [mm]
  rrect18% 1.059x0.547 smd paste+0 mask+0: 1(-0.877,0.915)
  rrect100% 1.059x0.547 smd paste+0 mask+0: 2(-0.877,-0.915) 3(0.877,0)
FP-CAT24C08TDI-GT3_TSOT-23-5-IPC_A [mm]
  rrect18% 1.54x0.566 smd paste+0 mask+0: 1(-1.216,0.95)
  rrect100% 1.54x0.566 smd paste+0 mask+0: 2(-1.216,0) 3(-1.216,-0.95) 4(1.216,-0.95) 5(1.216,0.95)
FP-CHS-01TA_SMT_SW_5MM4_2MM5-MFG [mm]
  rrect10% 1.6x1 smd paste+0 mask+0: 1(-2.54,0) 2(2.54,0)
FP-CL03A103KA3NNNC_0201-IPC_C [mil]
  rrect38% 13.94x10.34 smd paste+0 mask+0: 1(-10.01,0) 2(10.01,0)
FP-CL03A105MO3NRNH_0201-IPC_C [mil]
  rrect33% 15.83x11.94 smd paste+0 mask+0: 1(-9.87,0) 2(9.87,0)
FP-CL05A226MQ5N6J8_0402-IPC_C [mil]
  rrect21% 20.29x18.6 smd paste+0 mask+0: 1(-14.9,0) 2(14.9,0)
FP-CP2105-F01-GMR_QFN24-EP-IPC_A [mm]
  rrect42% 0.979x0.239 smd paste+0 mask+0: 1(-1.99,1.25)
  rrect100% 0.979x0.239 smd paste+0 mask+0: 2(-1.99,0.75) 3(-1.99,0.25) 4(-1.99,-0.25) 5(-1.99,-0.75) 6(-1.99,-1.25) 13(1.99,-1.25) 14(1.99,-0.75) 15(1.99,-0.25) 16(1.99,0.25) 17(1.99,0.75) 18(1.99,1.25)
  rrect100% 0.239x0.979 smd paste+0 mask+0: 7(-1.25,-1.99) 8(-0.75,-1.99) 9(-0.25,-1.99) 10(0.25,-1.99) 11(0.75,-1.99) 12(1.25,-1.99) 19(1.25,1.99) 20(0.75,1.99) 21(0.25,1.99) 22(-0.25,1.99) 23(-0.75,1.99) 24(-1.25,1.99)
  rrect4% 2.7x2.7 smd paste-1000 mask+0: 25(0,0)
FP-CRCW0402200RFKEDHP_0402-IPC_C [mil]
  rrect21% 20.29x18.6 smd paste+0 mask+0: 1(-14.9,0) 2(14.9,0)
FP-CX2016DB40000D0FLJCC_SMT_2MM0_1MM6-MFG [mm]
  rrect13% 0.9x0.8 smd paste+0 mask+0: 1(-0.7,-0.55) 2(0.7,-0.55) 3(0.7,0.55) 4(-0.7,0.55)
FP-CX2016DB48000C0WPLA2_SMD4-MFG [mm]
  rrect13% 0.9x0.8 smd paste+0 mask+0: 1(-0.7,-0.55) 2(0.7,-0.55) 3(0.7,0.55) 4(-0.7,0.55)
  silkscreen extent -1.85,-1.35 1.05,1.35
FP-ERJ-1GNF4701C_0201-IPC_C [mil]
  rrect38% 13.94x10.34 smd paste+0 mask+0: 1(-10.01,0) 2(10.01,0)
FP-EXB-18VR000X_0502-MFG [mm]
  rrect57% 0.175x0.3 smd paste+0 mask+0: 1(-0.6,-0.275) 2(-0.2,-0.275) 3(0.2,-0.275) 4(0.6,-0.275) 5(0.6,0.275) 6(0.2,0.275) 7(-0.2,0.275) 8(-0.6,0.275)
"FP-GRM033R6YA104KE14D_0201 (0603 Metric)-IPC_C" [mil]
  rrect38% 13.94x10.34 smd paste+0 mask+0: 1(-10.01,0) 2(10.01,0)
"FP-GRM0335C1H8R0BA01D_0201 (0603 metric)-IPC_C" [mil]
  rrect38% 13.94x10.34 smd paste+0 mask+0: 1(-10.01,0) 2(10.01,0)
FP-GRPB052MWCN-RC_HDR10-MFG [mm]
  rrect9% 1.12x1.12 hole 0.7 paste-1000 mask+0: 1(-2.54,1.15)
  round 1.12 hole 0.7 paste-1000 mask+0: 2(-2.54,2.42) 3(-1.27,1.15) 4(-1.27,2.42) 5(0,1.15) 6(0,2.42) 7(1.27,1.15) 8(1.27,2.42) 9(2.54,1.15) 10(2.54,2.42)
  silkscreen extent -3.77,-0.7 3.42,1.17
FP-M50-3930342_HDR3-MFG [mm]
  rrect9% 1.1x1.1 hole 0.6 paste-1000 mask+0: 1(-1.27,1)
  round 1.1 hole 0.6 paste-1000 mask+0: 2(0,1) 3(1.27,1)
  silkscreen extent -2.15,-0.6 2.15,2.09
FP-M50-3930442_HDR4-RECOMMENDED_LAND_PATTERN [mm]
  rrect9% 1.1x1.1 hole 0.6 paste-1000 mask+0: 1(-1.905,1)
  round 1.1 hole 0.6 paste-1000 mask+0: 2(-0.635,1) 3(0.635,1) 4(1.905,1)
"FP-MCKK2012TR47M_0805 (2012 Metric)-IPC_C" [mil]
  rrect9% 45.45x53.39 smd paste+0 mask+0: 1(-26.61,0) 2(26.61,0)
"FP-RC0201JR-070RL_0201 (0603 Metric)-IPC_C" [mil]
  rrect38% 13.94x10.34 smd paste+0 mask+0: 1(-10.01,0) 2(10.01,0)
"FP-RC0201JR-070RL_0201 (0603 METRIC)-IPC_C" [mil]
  rrect38% 13.94x10.34 smd paste+0 mask+0: 1(-10.01,0) 2(10.01,0)
"FP-RC0201JR-070RL_0201 (0603 Metric)-MFG" [mm]
  rrect29% 0.35x0.4 smd paste+0 mask+0: 1(-0.325,0) 2(0.325,0)
"FP-RC0402FR-073R83L_0402 (1005 Metric)-IPC_C" [mil]
  rrect21% 20.29x18.6 smd paste+0 mask+0: 1(-14.9,0) 2(14.9,0)
FP-RR0306P-103-D_0201-IPC_C [mil]
  rrect37% 13.31x10.73 smd paste+0 mask+0: 1(-10.52,0) 2(10.52,0)
"FP-TMK063CG391JT-F_0201 (0603 Metric)-IPC_C" [mil]
  rrect38% 13.94x10.34 smd paste+0 mask+0: 1(-10.01,0) 2(10.01,0)
IND_LQG15H [mm] "MuRata"
  rect 0.55x0.6 smd: 1(-0.475,0) 2(0.475,0)
  silkscreen extent -1.3,-0.3 -0.95,0.3
MHNP_2-5 [mil]
  round 95 hole 100 unplated mask+0: ""(0,0)
  Keep-Out Layer circle w1: c0,0 r100
MHNP_M2_PANHEAD_PHILLIPS [mil]
  round 83 hole 88 unplated mask+0: ""(0,0)
  Keep-Out Layer circle w1: c0,0 r88
RGZ0048A [mm] "VQFN-48"
  rrect42% 0.6x0.24 smd: 1(-3.4,2.75) 2(-3.4,2.25) 3(-3.4,1.75) 4(-3.4,1.25) 5(-3.4,0.75) 6(-3.4,0.25) 7(-3.4,-0.25) 8(-3.4,-0.75) 9(-3.4,-1.25) 10(-3.4,-1.75) 11(-3.4,-2.25) 12(-3.4,-2.75) 25(3.4,-2.75) 26(3.4,-2.25) 27(3.4,-1.75) 28(3.4,-1.25) 29(3.4,-0.75) 30(3.4,-0.25) 31(3.4,0.25) 32(3.4,0.75) 33(3.4,1.25) 34(3.4,1.75) 35(3.4,2.25) 36(3.4,2.75)
  rrect42% 0.24x0.6 smd: 13(-2.75,-3.4) 14(-2.25,-3.4) 15(-1.75,-3.4) 16(-1.25,-3.4) 17(-0.75,-3.4) 18(-0.25,-3.4) 19(0.25,-3.4) 20(0.75,-3.4) 21(1.25,-3.4) 22(1.75,-3.4) 23(2.25,-3.4) 24(2.75,-3.4) 37(2.75,3.4) 38(2.25,3.4) 39(1.75,3.4) 40(1.25,3.4) 41(0.75,3.4) 42(0.25,3.4) 43(-0.25,3.4) 44(-0.75,3.4) 45(-1.25,3.4) 46(-1.75,3.4) 47(-2.25,3.4) 48(-2.75,3.4)
  rrect2% 5.15x5.15 smd paste-2.6: 49(0,0)
RNF0026C [mm] "QFN, 26-Leads, Body 4x4.5mm, Pitch 0.5mm"
  rrect25% 0.6x0.4 smd paste-0.3: 1(-1.9,1.825) 8(-1.9,-1.825) 14(1.9,-1.825) 21(1.9,1.825)
  rrect40% 0.6x0.25 smd paste+0: 2(-1.9,1.25) 3(-1.9,0.75) 4(-1.9,0.25) 5(-1.9,-0.25) 6(-1.9,-0.75) 7(-1.9,-1.25) 15(1.9,-1.25) 16(1.9,-0.75) 17(1.9,-0.25) 18(1.9,0.25) 19(1.9,0.75) 20(1.9,1.25)
  rrect40% 0.25x1.82 smd paste-1: 9(-1,-1.54) 10(-0.5,-1.54) 11(0,-1.54) 12(0.5,-1.54) 13(1,-1.54) 22(1,1.54) 23(0.5,1.54) 24(0,1.54) 25(-0.5,1.54) 26(-1,1.54)
  rrect15% 2.24x0.66 smd paste-1: 27(0,0)
  rrect33% 0.6x0.3 on Top Paste: ""(-1.9,1.775) ""(-1.9,-1.775) ""(1.9,1.775) ""(1.9,-1.775)
  rrect33% 0.3x0.825 on Top Paste: ""(-1.575,2.037) ""(-1.575,-2.037) ""(1.575,2.037) ""(1.575,-2.037)
  rrect40% 0.25x0.81 on Top Paste: ""(-1,1.035) ""(-1,2.045) ""(-1,-2.045) ""(-1,-1.035) ""(-0.5,2.045) ""(-0.5,1.035) ""(-0.5,-1.035) ""(-0.5,-2.045) ""(0,2.045) ""(0,1.035) ""(0,-1.035) ""(0,-2.045) ""(0.5,2.045) ""(0.5,1.035) ""(0.5,-1.035) ""(0.5,-2.045) ""(1,1.035) ""(1,2.045) ""(1,-2.045) ""(1,-1.035)
  rrect15% 0.98x0.66 on Top Paste: ""(-0.59,0) ""(0.59,0)
  silkscreen extent -2.45,-2.7 2.45,2.7
RSE0010A [mm] "QFN, 10-Leads, Body 1.5x2mm, Pitch 0.5mm, TI Recommended"
  rect 0.55x0.2 smd: 1(-0.675,0.75) 2(-0.675,0.25) 3(-0.675,-0.25) 4(-0.675,-0.75) 6(0.675,-0.75) 7(0.675,-0.25) 8(0.675,0.25) 9(0.675,0.75)
  rect 0.3x0.6 smd: 5(0,-0.9) 10(0,0.9)
  silkscreen extent -1.07,-1.17 0.77,1.18
RSV0016A [mm] "QFN, 16-Leads, Body 1.8x2.6mm, Pitch 0.4mm, TI Recommended"
  rect 0.7x0.2 smd: 1(-0.75,0.6)
  rect 0.6x0.2 smd: 2(-0.8,0.2) 3(-0.8,-0.2) 4(-0.8,-0.6) 9(0.8,-0.6) 10(0.8,-0.2) 11(0.8,0.2) 12(0.8,0.6)
  rect 0.2x0.6 smd: 5(-0.6,-1.2) 6(-0.2,-1.2) 7(0.2,-1.2) 8(0.6,-1.2) 13(0.6,1.2) 14(0.2,1.2) 15(-0.2,1.2) 16(-0.6,1.2)
  silkscreen extent -1.08,-1.33 1.08,1.45
RUT0012A [mm] "QFN, 12-Leads, Body 1.7x2mm, Pitch 0.4mm, TI Recommended"
  rrect50% 0.7x0.2 smd: 1(-0.7,0.8) 2(-0.7,0.4) 3(-0.7,0) 4(-0.7,-0.4) 5(-0.7,-0.8) 7(0.7,-0.8) 8(0.7,-0.4) 9(0.7,0) 10(0.7,0.4) 11(0.7,0.8)
  rrect50% 0.2x0.7 smd: 6(0,-0.85) 12(0,0.85)
  silkscreen extent -0.9,-1.2 0.9,1.2
Samtec_QSH-030-01-X-D-A [mm] "Receptacle, 0.5 mm, 30x2, TH"
  rect 2.27x0.279 smd: 1(-2.865,7.25) 2(2.865,7.25) 3(-2.865,6.75) 4(2.865,6.75) 5(-2.865,6.25) 6(2.865,6.25) 7(-2.865,5.75) 8(2.865,5.75) 9(-2.865,5.25) 10(2.865,5.25) 11(-2.865,4.75) 12(2.865,4.75) 13(-2.865,4.25) 14(2.865,4.25) 15(-2.865,3.75) 16(2.865,3.75) 17(-2.865,3.25) 18(2.865,3.25) 19(-2.865,2.75) 20(2.865,2.75) 21(-2.865,2.25) 22(2.865,2.25) 23(-2.865,1.75) 24(2.865,1.75) 25(-2.865,1.25) 26(2.865,1.25) 27(-2.865,0.75) 28(2.865,0.75) 29(-2.865,0.25) 30(2.865,0.25) 31(-2.865,-0.25) 32(2.865,-0.25) 33(-2.865,-0.75) 34(2.865,-0.75) 35(-2.865,-1.25) 36(2.865,-1.25) 37(-2.865,-1.75) 38(2.865,-1.75) 39(-2.865,-2.25) 40(2.865,-2.25) 41(-2.865,-2.75) 42(2.865,-2.75) 43(-2.865,-3.25) 44(2.865,-3.25) 45(-2.865,-3.75) 46(2.865,-3.75) 47(-2.865,-4.25) 48(2.865,-4.25) 49(-2.865,-4.75) 50(2.865,-4.75) 51(-2.865,-5.25) 52(2.865,-5.25) 53(-2.865,-5.75) 54(2.865,-5.75) 55(-2.865,-6.25) 56(2.865,-6.25) 57(-2.865,-6.75) 58(2.865,-6.75) 59(-2.865,-7.25) 60(2.865,-7.25)
  round 0 hole 1.02 unplated: MH1(2.67,10.065) MH2(2.67,-10.065)
  rect 0.43x2.54 smd: MP1(0,8.065) MP4(0,-8.065)
  rect 0.43x4.7 smd: MP2(0,3.175) MP3(0,-3.175)
  silkscreen extent -3.9,-10.66 3.62,10.66
SW_218-4LPST [mil] "CTS Components"
  rect 50x30 smd: 1(-150,75) 2(-150,25) 3(-150,-25) 4(-150,-75) 5(150,-75) 6(150,-25) 7(150,25) 8(150,75)
  silkscreen extent -114,-123 114,123
SW_B3U-1000P [mm] "OMRON"
  rect 0.8x1.7 smd: 1(-1.7,0) 2(1.7,0)
  silkscreen extent -1.5,-1.25 1.5,1.25
TP_25MIL-SMT [mil]
  round 25 smd mask+0: 1(0,0)
TP_VIA_060RND040 [mil] "TP_VIA_060RND040"
  round 60 hole 40: 1(0,0)
USON-8L [mm] "SON, 8-Leads, Body 3x2mm, Pitch 0.5mm"
  rrect40% 0.6x0.25 smd: 1(-1.4,0.75) 2(-1.4,0.25) 3(-1.4,-0.25) 4(-1.4,-0.75) 5(1.4,-0.75) 6(1.4,-0.25) 7(1.4,0.25) 8(1.4,0.75)
  rrect50% 0.2x1.6 smd: 9(0,0)
  silkscreen extent -1.55,-1.17 0.65,1.17

## Part data
A1: library part CMP-0087189-1, "RF ANT 2.4GHZ CHIP SOLDER SMD"
C1 C4 C7 C42 C50 C51 C52 C53 C55 C59 C62 C65 C70 C73 C78 C82 C122: library part CMP-0006339-4, "CAP, CERM, 10 uF, 10 V, +/- 20%, X5R, 0402"
C2 C3 C6 C9 C10 C12 C13 C25 C26 C27 C35 C36 C37 C40 C43 C72 C86 C91 C92 C101 C105 C107 C108 C109 C114 C117 C118 C119 C120 C123 C126 C127 C128 C130: library part CMP-0086440-1, "Cap Ceramic 0.1uF 35V X5R 10% Pad SMD 0201 85C T/R"
C5 C11 C15 C16 C24 C100 C115 C116 C129: library part CMP-0086446-1, "1µF ±20% 16V Ceramic Capacitor X5R 0201"
C8 C125: library part CMP-0086445-1, "CAP CER 10000PF 25V X5R 0201"
C14 C71: library part CMP-0080076-1, "CAP, CERM, 4.7 pF, 50 V,+/- 3%, C0G/NP0, 0201"
C17 C18: library part CMP-0086441-1, "Cap Ceramic 8pF 50V C0G 0.1pF SMD 0201 125°C Paper T/R"
C19 C20 C38 C39: library part CMP-0087190-1, "CAP CER 12PF 25V C0G/NP0 0201"
C21 C93: library part CMP-0006345-2, "CAP, CERM, 12 pF, 50 V, +/- 5%, C0G/NP0, 0402"
C22 C23 C41: library part CMP-0085178-1, "CAP, CERM, 1 pF, 50 V,+/- 25%, C0G/NP0, AEC-Q200 Grade 1, 0402"
C28 C29 C44 C45 C46 C47 C48 C49 C54 C77: library part CMP-0089043-3, "CAP CER 22UF 6.3V X5R 0402"
C30 C56 C57 C58 C60 C61 C63 C64 C66 C67 C68 C75 C76 C80 C81 C84 C85 C87 C88 C94 C95 C96 C97 C98: library part CMP-0009781-1, "CAP, CERM, 0.22 uF, 10 V, +/- 20%, X5R, 0201"
C31 C32 C33 C34: library part CMP-0086438-1, "CAP CER 390PF 25V C0G/NP0 0201"
C69: library part CMP-0009718-2, "CAP, CERM, 0.047 uF, 16 V, +/- 10%, X5R, 0201"
C74 C79 C83 C102 C103: library part CMP-0009657-3, "CAP, CERM, 2.2 uF, 6.3 V, +/- 20%, X5R, 0201"
C89 C90: library part CMP-0081763-1, "CAP, CERM, 1 µF, 6.3 V,+/- 10%, X6S, 0402"
C99 C104: library part CMP-0086306-1, "CAP, CERM, 1.8 pF, 50 V,+/- 6%, C0G/NP0, 0402"
C106 C110: library part CMP-0006692-2, "CAP, CERM, 4700 pF, 50 V, +/- 10%, X7R, 0402"
D1 D2: library part CMP-0028829-2, "Diode, Schottky, 30 V, 2 A, 2-XFDFN"
FID1 FID2 FID3 FID4 FID5 FID6: library part CMP-0077181-1, "Fiducial mark.  There is nothing to buy or mount."
FL1 FL2 FL3 FL6 FL7 FL8 FL9 FL10 FL11 FL12 FL14 FL20 FL22: library part CMP-0078934-1, "Inductor, Ferrite Bead, Ferrite, 2.2 A, 0.035 ohm, AEC-Q200 Grade 1, SMD"
J1 J5: library part CMP-0055293-1, "Connector, Receptacle, Micro-USB Type B, R/A, Bottom Mount SMT"
J2: library part CMP-0075524-1, "Receptacle, 0.5 mm, 30x2, Gold, TH"
J3: library part CMP-0087187-1, "CONN HDR 1.27MM R/A AU 4POS"
J4 J6: library part CMP-0086453-1, "Easy-On™ Type FFC/FPC Connector, Right-Angle, Surface Mount, ZIF, Bottom Contact Style, 1.10mm Mated Height, 10 Circuits"
J7: library part CMP-0087786-1, "CONN HEADER R/A 10POS 1.27MM"
J8 J10: library part CMP-0087785-1, "CONN HEADER R/A 3POS 1.27MM"
J9: library part CMP-0075320-1, "Receptacle, Ultra Miniature Coaxial, Male Pin, 50 ohm, SMT"
L1 L6: library part CMP-0058626-1, "Inductor, Multilayer, Air Core, 2.4 nH, 0.3 A, 0.15 ohm, SMD"
L2 L3 L4 L5: library part CMP-0087178-1, "FIXED IND 470NH 4.5A 39 MOHM SMD"
L7: library part CMP-0062727-1, "Inductor, Multilayer, Ferrite, 6.8 uH, 0.11 A, 0.25 ohm, SMD"
L8: library part CMP-0003349-2, "Ferrite Bead, 1500 ohm @ 100 MHz, 0.5 A, 0603"
L9 L10: library part CMP-0058624-1, "Inductor, Multilayer, Air Core, 2 nH, 0.3 A, 0.1 ohm, SMD"
L11 L12 L13 L14: library part CMP-0003354-2, "Ferrite Bead, 26 ohm @ 100 MHz, 6 A, 0603"
LD1 LD2 LD3 LD4 LD5 LD6: library part CMP-0067682-2, "LED, Green, SMD"
Q1: library part CMP-0087176-1, "MOSFET N-CH 100V 170MA SOT23-3"
R1 R3 R7 R8 R18 R19 R20 R21 R22 R23 R35 R36 R43 R44 R45 R59 R65 R77 R78 R80 R81 R82 R83 R84 R85 R93 R94 R95 R96 R98 R104 R110 R118 R122 R124 R125 R134 R177 R178: library part CMP-0088002-1, "10 kOhms ±0.5% 0.05W, 1/20W Chip Resistor 0201 (0603 Metric)  Thin Film"
R2 R12 R14 R28 R30 R31 R32 R41 R51 R57 R58 R60 R61 R62 R63 R66 R67 R68 R70 R71 R72 R73 R74 R76 R86 R87 R90 R91 R97 R99 R100 R101 R102 R103 R105 R106 R109 R112 R113 R115 R116 R120 R121 R123 R127 R128 R129 R131 R136 R139 R160 R161 R166 R168 R182 R183 R184 R185: library part CMP-0086442-2, "RES SMD 0 OHM JUMPER 1/20W 0201"
R4 R5 R9 R29 R37 R89 R92: library part CMP-0027261-3, "RES, 100 k, 1%, 0.05 W, 0201"
R6 R46 R47 R48 R49: library part CMP-0027275-3, "RES, 33.2, 1%, 0.05 W, 0201"
R10 R11 R88 R130 R132 R133 R135 R137 R138 R140: library part CMP-0087185-1, "RES SMD 20 OHM 1% 1/20W 0201"
R13 R15 R17 R42 R111: library part CMP-0027072-1, "RES, 220, 5%, 0.05 W, 0201"
R16 R174 R176: library part CMP-0027880-1, "RES, 7.87 k, 1%, 0.05 W, 0201"
R24: library part CMP-0087183-1, "RES SMD 200 OHM 1% 1/5W 0402"
R25 R26 R33 R34 R38 R40 R64 R69 R141: library part CMP-0027745-1, "RES, 4.99 k, 1%, 0.05 W, 0201"
R27 R39 R107 R108: library part CMP-0027137-1, "RES, 510, 5%, 0.05 W, 0201"
R50 R75: library part CMP-0027052-1, "RES, 1.0 k, 5%, 0.05 W, 0201"
R52: library part CMP-0027452-1, "RES, 1.96 k, 1%, 0.05 W, 0201"
R53 R54 R55 R56: library part CMP-0086444-2, "RES Thick Film SMD 3.83O 1% 1/16W 0402 200ppm/°C"
R79 R180 R181: library part CMP-0087184-1, "RESISTOR, 0201, 0.05W, 1%, 4K7"
R114 R117 R119 R126: library part CMP-0026491-2, "RES, 61.9, 1%, 0.063 W, AEC-Q200 Grade 0, 0402"
R158 R170 R172: library part CMP-0027891-1, "RES, 82.5 k, 1%, 0.05 W, 0201"
R159 R171: library part CMP-0027165-1, "RES, 750, 5%, 0.05 W, 0201"
RA1 RA2 RA3 RA4 RA5 RA6 RA7 RA8 RA9: library part CMP-0087186-1, "RES ARRAY 4 RES ZERO OHM 0502"
S1 S2: library part CMP-0002128-2, "Switch, Slide, SPST 4 poles, SMT"
S3: library part CMP-0087181-1, "SWITCH SLIDE DIP SPST 100MA 6V"
SW2 SW3: library part CMP-0002150-2, "SWITCH TACTILE SPST-NO 0.05A 12V"
TP2 TP3 TP4 TP5 TP6 TP7 TP8 TP9 TP10 TP11 TP12 TP13 TP14 TP15 TP16 TP17 TP18 TP19 TP26 TP27 TP46: library part CMP-0078143-3, "TEST POINT.  No entry in BOM."
TP20: library part CMP-0086474-1, "PC Test Point, Loop Brass, Tin Plating 0.047\" (1.19mm) Hole Diameter Mounting Type"
U1: library part CMP-0079120-2, "4-A + 2.5-A + Two 1.5-A Buck Converters With Integrated Switches, RNF0026C (VQFN-HR-26)"
U2: library part CMP-0860942-2, "XI6843ARQGALP, ALP0180A (BGA-180)"
U3: library part CMP-0087172-1, "I/O Controller Interface IC USB to Dual UART bridge"
U4: library part CMP-0035419-1, "Single Output High PSRR LDO, 200 mA, Fixed 3 V Output, 2.7 to 5.5 V Input, 5-pin SOT-23 (DBV), -40 to 85 degC, Green (RoHS & no Sb/Br)"
U5: library part CMP-0067398-2, "Automotive Grade, 1.4V-Capable +/-0.5degC Temperature Sensor with Alert Function and I2C/SMBus, DRL0006A (SOT-OTHER-6)"
U6: library part CMP-0087170-1, "8KB I2C SER EEPROM TSOT 23"
U7: library part CMP-0087171-1, "IMU ACCEL/GYRO/MAG I2C 32BIT"
U8: library part CMP-0083675-2, "SimpleLink(TM) Bluetooth(R) 5 low energy Wireless MCU, RGZ0048A (VQFN-48)"
U9: library part CMP-0078466-1, "ULTRA LOW POWER, 16M-BIT [x 1/x 2/x 4] CMOS MXSMIO (SERIAL MULTI I/O) FLASH MEMORY, SON-8"
U10: library part CMP-0043349-1, "Low-Voltage 8-Bit I2C and SMBus I/O Expander, 1.65 to 5.5 V, -40 to 85 degC, 16-pin UQFN (RSV), Green (RoHS & no Sb/Br)"
U11: library part CMP-0050992-5, "1-Channel, 2:1 Analog Switch, DSF0006A (X2SON-6)"
U12 U17: library part CMP-0065183-3, "Automotive Fault Protected CAN Transceiver With Flexible Data-Rate, DRB0008F (VSON-8)"
U13: library part CMP-0067415-1, "10-Ohm Quad SPDT Analog Switch, RSV0016A (UQFN-16)"
U14: library part CMP-0860038-1, "Automotive 4-Bit Bidirectional Voltage-Level Translator with Auto Direction Sensing and +/-15kV ESD, RUT0012A (UQFN-12)"
U15 U18: library part CMP-0074545-1, "Dual 10-ohm SPDT Analog Switch, RSE0010A (UQFN-10)"
U16: library part CMP-0087998-2, "AND Gate IC 1 Channel  6-SON (1x1)"
U19: library part CMP-0043358-3, "Dual In / Single Out Autoswitching Power Mux, 2.8 to 5.5 V, -40 to 85 degC, 8-pin SON (DRB), Green (RoHS & no Sb/Br)"
Y1: library part CMP-0087164-1, "CRYSTAL 40.0000MHZ 8PF SMD"
Y2: library part CMP-0088076-1, "48MHz ±20ppm Crystal 7pF 50 Ohms 4-SMD, No Lead"
Y3 Y4: library part CMP-0088006-1, "CRYSTAL 32.768KHZ 4PF SMD"
ZZ1: library part CMP-0003616-3
ZZ2: library part CMP-0077236-1
ZZ3: library part CMP-0077237-1
ZZ4 ZZ5.2: library part CMP-0077238-1
ZZ5.1: library part CMP-0077238-1, "Cut the thermal pad(Part Number#GPVOUS-0.125-AC-0816) for the shape and size of the inner surface of the heatsink(Part Number#160018120021) and paste it on the inner surface of the heatsink;"

## Via types
v1: diameter 18, hole 8, Top Layer to Bottom Layer, tented both sides, 737 vias
v2: diameter 19.68, hole 7.87, Top Layer to Bottom Layer, tented both sides, 36 vias
v3: diameter 17, hole 8, Top Layer to Bottom Layer, tented both sides, 1 vias